# Altium PCB PCB.PcbDoc (part 3 of 3)
Units mm, origin at the board's own origin, x right, y up, seen from the top; angles counter-clockwise.
Board outline 116.97 x 81.03 mm, 4 copper layers (Top Layer, Int1 (GND), Int2 (PWR), Bottom Layer), stack 1.369 mm thick; 124 components, 94 nets, 431 pads, 1026 vias.
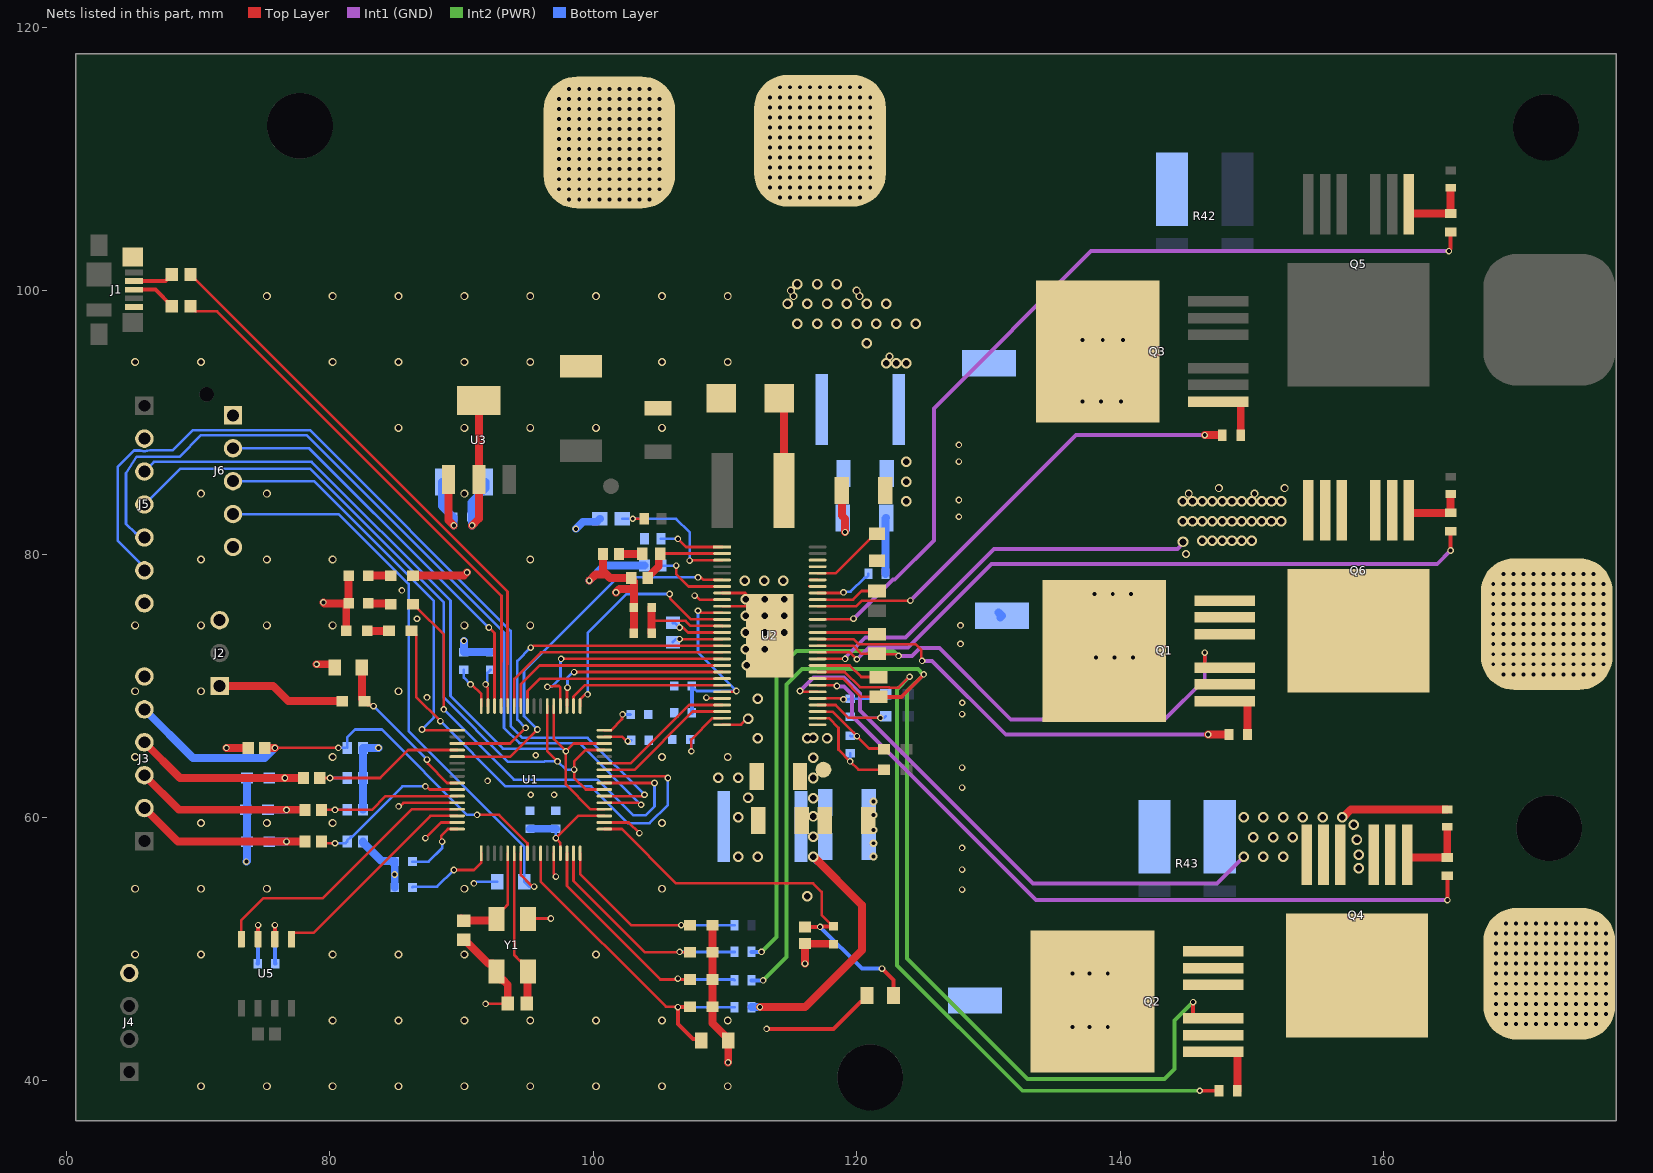
[diagram p4: the nets of this part, all layers, seen from the top]

## Via types
v1: diameter 0.5, hole 0.3, Top Layer to Bottom Layer, 784 vias
v2: diameter 0.8/0.8/0.8/0.8 (per signal layer), hole 0.5, Top Layer to Bottom Layer, 130 vias
v3: diameter 0.6, hole 0.4, Top Layer to Bottom Layer, 82 vias
v4: diameter 0.6, hole 0.3, Top Layer to Bottom Layer, 23 vias
v5: diameter 0.8, hole 0.5, Top Layer to Bottom Layer, 7 vias

## Nets (pads, with @x,y where several pads share a name; then routed paths per layer and width w, separated by ;. In a path a pad name is that pad's centre, name@x,y a point inside that pad or via, vN(x,y) a via of type N, cw(c..) or ccw(c..) an arc to the next point about the centre after c; other vN are vias at no path point) (continued)
H2_LOW: C1.2 C2.2 C3.1 C4.1 C5.2 C6.2 C7.2 C8.2 C9.2 C10.2 C11.2 C12.2 C13.2 C14.2 C15.2 C16.2 C17.2 C18.2 C19.2 C20.2 C21.2 C22.2 C23.2 C28.2 C29.1 C30.2 C31.2 C32.2 C33.2 C34.2 C35.1 C36.2 C37.2 C38.2 C40.2 C43.2 C44.2 C45.2 C46.2 C47.1 C48.1 C49.1 D1.1 D2.1 D3.1 D4.2 D5.2 J1.5 J1.6 J2.3 J3.6 J4.4 J5.7 J6.5 P1.P? Q6.2 Q6.3 Q6.5 Q6.6 Q6.7 R15.1 R17.2 R20.2 R23.2 R25.1 R29.1 R30.1 R31.1 R35.2 R42.1 R43.1 U1.12 U1.18 U1.60 U1.63 U2.8 U2.10 U2.28 U2.39 U2.57 U3.1 U5.2 Y1.2 Y1.4 | length 137.8
  Top Layer w0.2: v1(85.217,60.833) 85.298,60.833 85.578,61.113 89.656,61.113 U1.60@89.659,61.115 ; v1(87.249,58.42) 88.444,59.615 U1.63@89.659,59.615 ; v1(91.821,45.847) 93.493,45.847 C3.1@93.509,45.863 ; Y1.2@95.053,52.292 95.085,52.324 v1(96.774,52.324) ; U1.12@97,57.274 97,55.735 97.155,55.58 v1(97.155,55.499) ; U1.18@100.841,59.615 102.691,59.615 v1(103.505,58.801) ; U2.28@109.786,67.037 111.223,67.037 111.686,67.5 v2(111.75,67.5) ; U2.10@109.786,76.037 111.706,76.037 U2.57@113.411,74.332 ; U2.8@109.786,77.037 111.531,77.037 113.411,75.157 U2.57@113.411,74.332 ; U2.57@113.411,73.787 U2.57@113.411,74.332 ; U2.39@117.036,72.037 v1(119.126,72.037)
  Top Layer w0.3: U5.2@75.819,50.758 v1(75.819,51.816)
  Top Layer w0.6: v1(78.994,71.628) 80.204,71.628 80.382,71.45 C1.2@80.382,71.374 ; v1(79.502,76.327) 79.574,76.255 D1.1@81.419,76.255 ; D3.1@81.242,74.168 81.242,76.078 D1.1@81.419,76.255 ; D2.1@81.419,78.359 D1.1@81.419,76.255 ; U3.1@89.013,85.646 89.013,82.564 v1(89.408,82.169) ; C4.1@90.17,50.71 90.22,50.71 92.038,48.892 92.353,48.892 92.653,48.592 Y1.4@92.653,48.292 92.653,47.992 92.953,47.692 93.105,47.692 93.509,47.288 C3.1@93.509,45.863 ; v1(99.695,77.978) 100.16,78.443 101.008,78.443 ; C38.2@100.746,80.01 100.746,78.705 101.008,78.443 ; v1(101.727,77.089) 101.981,77.343 103.084,77.343 ; C33.2@103.084,73.992 C34.2@103.084,75.946 103.084,77.343 ; R31.1@109.054,51.816 R30.1@109.054,49.754 R29.1@109.054,47.693 R15.1@109.054,45.624 109.054,44.369 C23.2@110.245,43.178 ; v1(110.236,41.402) 110.245,41.411 C23.2@110.245,43.053 ; v1(116.078,48.895) R35.2@116.078,50.428 116.103,50.404 118.212,50.404 C45.2@118.237,50.379 ; 101.008,78.443 101.27,78.181 C40.2@102.88,78.181 102.88,78.131 103.084,77.927 103.084,77.343
  Int1 (GND) w0.3: v1(119.126,72.037) 119.126,72.091 119.226,72.191 119.226,72.236 120.65,73.66 123.698,73.66 130.429,80.391 144.354,80.391 144.78,80.817 v5(144.78,80.914)
  Bottom Layer w0.2: v1(90.932,54.991) 91.013,54.991 91.14,55.118 C2.2@92.701,55.118
  Bottom Layer w0.3: v1(75.819,51.816) 75.839,51.796 75.839,48.915 C46.2@75.859,48.895
  Bottom Layer w0.6: C14.2@82.515,58.166 82.515,58.091 83.914,56.692 84.898,56.692 84.923,56.667 C8.2@84.923,56.642 v1(84.923,55.665) C5.2@84.923,54.688 ; C15.2@82.515,60.579 C16.2@82.515,62.992 C13.2@82.515,65.278 v1(83.692,65.278) ; C43.2@88.52,85.471 88.52,83.652 89.318,82.854 89.343,82.854 89.368,82.829 C44.2@89.368,82.804 89.393,82.779 89.393,82.184 v1(89.408,82.169) ; v1(90.17,73.406) C7.2@90.17,72.557 C12.2@92.202,72.557 ; v1(98.679,81.915) 99.216,82.452 100.271,82.452 R25.1@100.496,82.677 ; v1(99.695,77.978) 100.838,79.121 R20.2@103.895,79.121 ; R17.2@122.189,78.486 122.189,82.712 C17.2@122.229,82.752 ; C48.1@130.778,75.565 C48.1@131.032,75.311 C48.1@130.905,75.184
  other v1: 128.013,54.51 128.013,56.034 128.013,57.685 95.25,61.722 97.028,61.722 128.013,62.257 91.975,62.78 128.013,63.781 95.631,64.72 128.013,67.845 128.016,68.707 87.373,69.115 127.886,73.179 127.886,74.576 86.611,75.084 85.468,77.243 127.759,82.831 127.759,84.101 127.759,87.022 127.759,88.292 98.171,106.934 98.933,106.934 99.695,106.934 100.457,106.934 101.219,106.934 101.981,106.934 102.743,106.934 103.505,106.934 104.267,106.934 97.409,107.696 98.171,107.696 98.933,107.696 99.695,107.696 100.457,107.696 101.219,107.696 101.981,107.696 102.743,107.696 103.505,107.696 104.267,107.696 105.029,107.696 97.409,108.458 98.171,108.458 98.933,108.458 99.695,108.458 100.457,108.458 101.219,108.458 101.981,108.458 102.743,108.458 103.505,108.458 104.267,108.458 105.029,108.458 97.409,109.22 98.171,109.22 98.933,109.22 99.695,109.22 100.457,109.22 101.219,109.22 101.981,109.22 102.743,109.22 103.505,109.22 104.267,109.22 105.029,109.22 97.409,109.982 98.171,109.982 98.933,109.982 99.695,109.982 100.457,109.982 101.219,109.982 101.981,109.982 102.743,109.982 103.505,109.982 104.267,109.982 105.029,109.982 97.409,110.744 98.171,110.744 98.933,110.744 99.695,110.744 100.457,110.744 101.219,110.744 101.981,110.744 102.743,110.744 103.505,110.744 104.267,110.744 105.029,110.744 97.409,111.506 98.171,111.506 98.933,111.506 99.695,111.506 100.457,111.506 101.219,111.506 101.981,111.506 102.743,111.506 103.505,111.506 104.267,111.506 105.029,111.506 97.409,112.268 98.171,112.268 98.933,112.268 99.695,112.268 100.457,112.268 101.219,112.268 101.981,112.268 102.743,112.268 103.505,112.268 104.267,112.268 105.029,112.268 97.409,113.03 98.171,113.03 98.933,113.03 99.695,113.03 100.457,113.03 101.219,113.03 101.981,113.03 102.743,113.03 103.505,113.03 104.267,113.03 105.029,113.03 97.409,113.792 98.171,113.792 98.933,113.792 99.695,113.792 100.457,113.792 101.219,113.792 101.981,113.792 102.743,113.792 103.505,113.792 104.267,113.792 105.029,113.792 97.409,114.554 98.171,114.554 98.933,114.554 99.695,114.554 100.457,114.554 101.219,114.554 101.981,114.554 102.743,114.554 103.505,114.554 104.267,114.554 105.029,114.554 98.171,115.316 98.933,115.316 99.695,115.316 100.457,115.316 101.219,115.316 101.981,115.316 102.743,115.316 103.505,115.316 104.267,115.316
  other v2: 116.25,54 111,57 112.5,57 111,60 111.75,61.5 109.5,63 111,63 112.5,66 112.5,69 111.639,71.552 111.569,72.771 113.03,72.771 111.569,74.041 113.03,74.041 114.49,74.041 111.569,75.311 113.03,75.311 114.49,75.311 111.569,76.581 113.03,76.581 114.49,76.581 111.506,77.978 112.966,77.978 114.427,77.978 146.25,81 146.25,81 147,81 147.75,81 147.75,81 148.5,81 149.25,81 150,81 144.75,82.5 145.5,82.5 145.5,82.5 146.25,82.5 147,82.5 147,82.5 147.75,82.5 148.5,82.5 148.5,82.5 149.25,82.5 150,82.5 150.75,82.5 151.5,82.5 151.5,82.5 152.25,82.5 123.75,84 144.75,84 144.75,84 145.5,84 146.25,84 146.25,84 147,84 147.75,84 147.75,84 148.5,84 149.25,84 149.25,84 150,84 150.75,84 150.75,84 151.5,84 152.25,84 123.75,85.5 123.75,87 123.75,87 122.25,94.5 123,94.5 123,94.5 123.75,94.5 120.75,96 120.75,96 115.5,97.5 115.5,97.5 117,97.5 117,97.5 118.5,97.5 118.5,97.5 120,97.5 121.5,97.5 123,97.5 124.5,97.5 114.75,99 116.25,99 116.25,99 117.75,99 119.25,99 120.75,99 122.25,99 115.5,100.5 115.5,100.5 117,100.5 117,100.5 118.5,100.5 118.5,100.5
  other v3: 70.212,39.583 75.212,39.583 80.212,39.583 85.212,39.583 90.212,39.583 95.212,39.583 100.212,39.583 105.212,39.583 110.212,39.583 80.212,44.583 85.212,44.583 90.212,44.583 95.212,44.583 100.212,44.583 105.212,44.583 110.212,44.583 65.212,49.583 70.212,49.583 80.212,49.583 85.212,49.583 90.212,49.583 100.212,49.583 65.212,54.583 70.212,54.583 75.212,54.583 90.212,54.583 105.212,54.583 70.212,59.583 75.212,59.583 80.212,59.583 105.212,59.583 65.212,64.583 80.212,64.583 105.212,64.583 110.212,64.583 65.212,69.583 70.212,69.583 85.212,69.583 65.212,74.583 70.212,74.583 75.212,74.583 80.212,74.583 90.212,74.583 95.212,74.583 70.212,79.583 75.212,79.583 80.212,79.583 95.212,79.583 145,80 70.212,84.583 75.212,84.583 90.212,84.583 145.212,84.583 150.212,84.583 147.5,85 152.5,85 85.212,89.583 90.212,89.583 95.212,89.583 100.212,89.583 105.212,89.583 65.212,94.583 70.212,94.583 80.212,94.583 85.212,94.583 90.212,94.583 95.212,94.583 105.212,94.583 110.212,94.583 122.5,95 75.212,99.583 80.212,99.583 85.212,99.583 90.212,99.583 95.212,99.583 100.212,99.583 105.212,99.583 110.212,99.583 115.212,99.583 120.212,99.583 115,100 120,100
  other v4: 121.285,57.023 121.285,58.039 121.285,59.055 121.285,60.198 121.285,61.214
H2_VS: C25.2 P4.P? Q1.2 Q1.3 Q1.5 Q1.6 Q1.7 Q6.8 R27.2 U2.41 | length 70.6
  Top Layer w0.2: U2.41@117.036,73.037 119.762,73.037 120.385,72.414 C25.2@121.539,72.414 121.563,72.39 122.982,72.39 123.109,72.263 v1(123.19,72.263)
  Top Layer w0.3: v1(146.431,72.517) 146.431,71.624 146.681,71.374 Q1.3@147.955,71.374
  Int1 (GND) w0.3: v1(123.19,72.263) 124.206,72.263 124.803,72.86 126.276,72.86 131.699,67.437 143.383,67.437 146.431,70.485 v1(146.431,72.517)
  Int2 (PWR) w0.3: v1(112.776,49.784) 113.919,50.927 113.919,71.12 115.443,72.644 122.809,72.644 v1(123.19,72.263)
  Bottom Layer w0.3: R27.2@112.029,49.784 v1(112.776,49.784)
  other v1: 169.1,70.866 169.862,70.866 170.624,70.866 171.386,70.866 172.148,70.866 172.91,70.866 173.672,70.866 174.434,70.866 175.196,70.866 175.958,70.866 168.338,71.628 169.1,71.628 169.862,71.628 170.624,71.628 171.386,71.628 172.148,71.628 172.91,71.628 173.672,71.628 174.434,71.628 175.196,71.628 175.958,71.628 176.72,71.628 168.338,72.39 169.1,72.39 169.862,72.39 170.624,72.39 171.386,72.39 172.148,72.39 172.91,72.39 173.672,72.39 174.434,72.39 175.196,72.39 175.958,72.39 176.72,72.39 168.338,73.152 169.1,73.152 169.862,73.152 170.624,73.152 171.386,73.152 172.148,73.152 172.91,73.152 173.672,73.152 174.434,73.152 175.196,73.152 175.958,73.152 176.72,73.152 168.338,73.914 169.1,73.914 169.862,73.914 170.624,73.914 171.386,73.914 172.148,73.914 172.91,73.914 173.672,73.914 174.434,73.914 175.196,73.914 175.958,73.914 176.72,73.914 168.338,74.676 169.1,74.676 169.862,74.676 170.624,74.676 171.386,74.676 172.148,74.676 172.91,74.676 173.672,74.676 174.434,74.676 175.196,74.676 175.958,74.676 176.72,74.676 168.338,75.438 169.1,75.438 169.862,75.438 170.624,75.438 171.386,75.438 172.148,75.438 172.91,75.438 173.672,75.438 174.434,75.438 175.196,75.438 175.958,75.438 176.72,75.438 168.338,76.2 169.1,76.2 169.862,76.2 170.624,76.2 171.386,76.2 172.148,76.2 172.91,76.2 173.672,76.2 174.434,76.2 175.196,76.2 175.958,76.2 176.72,76.2 168.338,76.962 169.1,76.962 169.862,76.962 170.624,76.962 171.386,76.962 172.148,76.962 172.91,76.962 173.672,76.962 174.434,76.962 175.196,76.962 175.958,76.962 176.72,76.962 168.338,77.724 169.1,77.724 169.862,77.724 170.624,77.724 171.386,77.724 172.148,77.724 172.91,77.724 173.672,77.724 174.434,77.724 175.196,77.724 175.958,77.724 176.72,77.724 169.1,78.486 169.862,78.486 170.624,78.486 171.386,78.486 172.148,78.486 172.91,78.486 173.672,78.486 174.434,78.486 175.196,78.486 175.958,78.486
H3_LOW: Q4.2 Q4.3 Q4.5 Q4.6 Q4.7 R41.2 R43.2 U2.34 | length 51.7
  Top Layer w0.2: v1(115.697,69.596) 115.754,69.539 117.034,69.539 U2.34@117.036,69.537
  Top Layer w0.6: v2(156.877,60) 156.931,60 157.525,60.594 R41.2@164.846,60.594
  Int1 (GND) w0.3: v1(115.697,69.596) 116.713,70.612 119.057,70.612 120.269,69.4 120.269,68.127 133.405,54.991 147.368,54.991 v2(149.377,57)
  other v2: 158.115,56.134 150.877,57 152.377,57 158.115,57.15 157.988,58.293 150.127,58.5 151.627,58.5 153.127,58.5 157.734,59.436 149.377,60 150.877,60 152.377,60 153.877,60 155.377,60
H3_VS: C27.2 P5.P? Q2.2 Q2.3 Q2.5 Q2.6 Q2.7 Q4.8 R28.2 U2.36 | length 99.3
  Top Layer w0.2: U2.36@117.036,70.537 118.947,70.537 120.324,69.16 C27.2@121.666,69.16
  Top Layer w0.3: C27.2@121.666,69.16 123.389,69.16 v1(125.095,70.866) ; v1(145.542,45.974) 145.542,44.995 145.792,44.745 Q2.3@147.066,44.745
  Int2 (PWR) w0.3: v1(112.903,47.625) 114.681,49.403 114.681,70.104 115.832,71.255 124.652,71.255 125.041,70.866 v1(125.095,70.866) 123.825,69.596 123.825,49.276 132.969,40.132 143.383,40.132 144.145,40.894 144.145,44.577 v1(145.542,45.974)
  Bottom Layer w0.3: R28.2@112.029,47.625 v1(112.903,47.625)
  other v1: 169.291,44.323 170.053,44.323 170.815,44.323 171.577,44.323 172.339,44.323 173.101,44.323 173.863,44.323 174.625,44.323 175.387,44.323 176.149,44.323 168.529,45.085 169.291,45.085 170.053,45.085 170.815,45.085 171.577,45.085 172.339,45.085 173.101,45.085 173.863,45.085 174.625,45.085 175.387,45.085 176.149,45.085 176.911,45.085 168.529,45.847 169.291,45.847 170.053,45.847 170.815,45.847 171.577,45.847 172.339,45.847 173.101,45.847 173.863,45.847 174.625,45.847 175.387,45.847 176.149,45.847 176.911,45.847 168.529,46.609 169.291,46.609 170.053,46.609 170.815,46.609 171.577,46.609 172.339,46.609 173.101,46.609 173.863,46.609 174.625,46.609 175.387,46.609 176.149,46.609 176.911,46.609 168.529,47.371 169.291,47.371 170.053,47.371 170.815,47.371 171.577,47.371 172.339,47.371 173.101,47.371 173.863,47.371 174.625,47.371 175.387,47.371 176.149,47.371 176.911,47.371 168.529,48.133 169.291,48.133 170.053,48.133 170.815,48.133 171.577,48.133 172.339,48.133 173.101,48.133 173.863,48.133 174.625,48.133 175.387,48.133 176.149,48.133 176.911,48.133 168.529,48.895 169.291,48.895 170.053,48.895 170.815,48.895 171.577,48.895 172.339,48.895 173.101,48.895 173.863,48.895 174.625,48.895 175.387,48.895 176.149,48.895 176.911,48.895 168.529,49.657 169.291,49.657 170.053,49.657 170.815,49.657 171.577,49.657 172.339,49.657 173.101,49.657 173.863,49.657 174.625,49.657 175.387,49.657 176.149,49.657 176.911,49.657 168.529,50.419 169.291,50.419 170.053,50.419 170.815,50.419 171.577,50.419 172.339,50.419 173.101,50.419 173.863,50.419 174.625,50.419 175.387,50.419 176.149,50.419 176.911,50.419 168.529,51.181 169.291,51.181 170.053,51.181 170.815,51.181 171.577,51.181 172.339,51.181 173.101,51.181 173.863,51.181 174.625,51.181 175.387,51.181 176.149,51.181 176.911,51.181 169.291,51.943 170.053,51.943 170.815,51.943 171.577,51.943 172.339,51.943 173.101,51.943 173.863,51.943 174.625,51.943 175.387,51.943 176.149,51.943
NetC1_1: C1.1 R1.1 U1.57 | length 12.4
  Top Layer w0.2: R1.1@82.432,68.99 82.888,68.534 83.15,68.534 83.231,68.453 v1(83.312,68.453) ; v1(87.376,64.389) 87.433,64.332 87.433,64.078 88.896,62.615 U1.57@89.659,62.615
  Top Layer w0.6: R1.1@82.432,68.99 C1.1@82.432,71.374
  Bottom Layer w0.2: v1(83.312,68.453) v1(87.376,64.389)
NetC2_1: C2.1 J6.4 U1.7 | length 45.7
  Top Layer w0.2: U1.7@94.5,57.274 94.5,55.614 95.252,54.862 95.297,54.862 95.423,54.737 v1(95.504,54.737)
  Bottom Layer w0.2: J6.4@72.644,83.031 80.672,83.031 85.979,77.724 85.979,66.548 94.751,57.776 C2.1@94.751,55.118 94.751,55.115 95.129,54.737 v1(95.504,54.737)
NetC3_2: C3.2 U1.6 Y1.1 | length 11.7
  Top Layer w0.2: U1.6@94,57.274 94,54.175 93.999,54.174 93.999,49.54 94.447,49.092 94.553,49.092 94.799,48.846 Y1.1@94.799,48.419
  Top Layer w0.6: C3.2@94.942,45.879 C3.2@94.959,45.863 95.006,45.91 95.006,48.245 Y1.1@95.053,48.292
NetC4_2: C4.2 U1.5 Y1.3 | length 8.2
  Top Layer w0.2: Y1.3@92.653,52.292 92.653,52.592 93.153,53.092 93.224,53.092 93.5,53.368 U1.5@93.5,57.274
  Top Layer w0.6: C4.2@89.945,52.335 90.12,52.16 C4.2@90.17,52.16 92.521,52.16 Y1.3@92.653,52.292
NetC11_1: C11.1 U1.31 | length 2.2
  Top Layer w0.2: U1.31@100.841,66.115 102.206,66.115 102.535,65.786 v1(102.616,65.786)
  Bottom Layer w0.2: v1(102.616,65.786) 102.792,65.786 C11.1@102.87,65.864
NetC12_1: C12.1 U1.47 | length 3
  Top Layer w0.2: v1(91.821,70.104) 91.821,70.023 92,69.844 U1.47@92,68.456
  Bottom Layer w0.2: v1(91.821,70.104) 91.821,70.185 91.952,70.316 91.952,70.982 92.177,71.207 C12.1@92.202,71.207
NetC13_1: C13.1 J3.5 R7.1 U1.8 | length 36.9
  Top Layer w0.2: v1(75.819,65.278) v1(80.645,65.278) ; v1(91.186,60.198) 92.837,60.198 95,58.035 U1.8@95,57.274
  Top Layer w0.6: R7.1@75.048,65.278 v1(75.819,65.278)
  Bottom Layer w0.2: v1(80.645,65.278) C13.1@81.153,65.278 ; C13.1@81.315,65.278 81.315,66.075 81.915,66.675 83.947,66.675 90.424,60.198 v1(91.186,60.198)
  Bottom Layer w0.6: J3.5@65.913,68.206 69.603,64.516 75.057,64.516 v1(75.819,65.278)
NetC14_1: C14.1 R13.2 U1.58 | length 12.3
  Top Layer w0.2: R13.2@79.366,58.166 79.493,58.039 v1(80.391,58.039) ; v1(87.249,62.357) 87.33,62.357 87.572,62.115 U1.58@89.659,62.115
  Bottom Layer w0.2: v1(80.391,58.039) 81.188,58.039 C14.1@81.315,58.166 81.315,58.241 81.59,58.516 81.665,58.516 85.506,62.357 v1(87.249,62.357)
NetC15_1: C15.1 R12.2 U1.59 | length 11.6
  Top Layer w0.2: R12.2@79.366,60.579 83.185,60.579 84.221,61.615 U1.59@89.659,61.615
  Bottom Layer w0.2: v1(80.391,60.579) C15.1@81.315,60.579
NetC16_1: C16.1 R11.2 U1.52 | length 12.4
  Top Layer w0.2: R11.2@79.239,62.992 v1(80.01,62.992) 83.82,62.992 85.943,65.115 U1.52@89.659,65.115
  Bottom Layer w0.2: v1(80.01,62.992) C16.1@81.061,62.992
NetC23_1: C23.1 R14.1 R15.2 U1.10 | length 25.2
  Top Layer w0.2: U1.10@96,57.159 96,55.13 105.506,45.624 v1@106.426,45.624
  Top Layer w0.3: R15.2@107.354,45.624 107.339,45.608 106.441,45.608 v1(106.426,45.593) 106.426,44.323 107.569,43.18 108.068,43.18 C23.1@108.195,43.053
  Bottom Layer w0.2: v1(106.426,45.593) R14.1@110.729,45.593
NetC24_1: C24.1 U2.48 | length 4.8
  Top Layer w0.2: U2.48@117.036,76.537 119.717,76.537 120.372,77.192 C24.1@121.539,77.192
NetC25_1: C25.1 U2.43 | length 4.6
  Top Layer w0.2: U2.43@117.036,74.037 121.416,74.037 C25.1@121.539,73.914
NetC26_1: C26.1 U2.52 | length 5.7
  Top Layer w0.2: U2.52@117.036,78.537 118.408,78.537 121.414,81.543 C26.1@121.539,81.543
NetC26_2: C26.2 D4.1 L1.1 U2.50 U2.51 | length 8.6
  Top Layer w0.2: U2.50@116.39,77.539 117.034,77.539 U2.50@117.036,77.537 ; U2.51@116.465,78.037 U2.51@117.036,78.037 ; C26.2@121.412,79.366 C26.2@121.539,79.493
  Top Layer w0.3: L1.1@114.491,84.836 L1.1@114.526,84.871
  Top Layer w0.6: D4.1@114.128,91.821 114.491,91.458 L1.1@114.491,84.836
NetC27_1: C27.1 U2.38 | length 5
  Top Layer w0.2: U2.38@117.036,71.537 119.471,71.537 120.348,70.66 C27.1@121.666,70.66
NetC30_1: C30.1 U2.27 | length 4.8
  Top Layer w0.2: v1(107.442,65.024) 107.442,65.913 109.064,67.535 109.783,67.535 U2.27@109.786,67.537
  Bottom Layer w0.2: C30.1@107.355,65.913 107.442,65.826 v1(107.442,65.024)
NetC33_1: C33.1 C34.1 U2.13 | length 7.5
  Top Layer w0.2: 104.434,74.93 107.006,74.93 107.393,74.543 109.2,74.543 109.203,74.539 109.783,74.539 U2.13@109.786,74.537
  Top Layer w0.6: C33.1@104.434,73.992 104.434,74.93 C34.1@104.434,75.946
NetC38_1: C38.1 R18.2 | length 1.8
  Top Layer w0.6: C38.1@101.946,80.01 R18.2@103.719,80.01
NetC39_1: C39.1 R19.2 U2.32 | length 8.4
  Top Layer w0.2: U2.32@117.036,68.537 118.407,68.537 119.38,67.564 v1(121.793,67.564)
  Bottom Layer w0.2: C39.1@119.507,67.651 119.594,67.564 R19.2@122.086,67.564 ; v1(121.793,67.564) R19.2@122.086,67.564 ; R19.2@122.086,67.564 R19.2@122.213,67.691 R19.2@122.086,67.564
NetC39_2: C39.2 R16.2 U2.33 | length 5.4
  Top Layer w0.2: U2.33@117.036,69.037 118.732,69.037 118.75,69.018 118.942,69.018 v1(118.999,68.961)
  Bottom Layer w0.2: v1(118.999,68.961) 119.467,68.961 C39.2@119.507,69.001 121.822,69.001 122.163,69.342 R16.2@122.213,69.342
NetC40_1: C40.1 R18.1 U2.2 | length 6.9
  Top Layer w0.2: R18.1@105.069,80.01 105.096,80.037 U2.2@109.786,80.037
  Top Layer w0.6: C40.1@104.13,78.181 104.13,78.231 104.969,79.07 104.969,79.91 R18.1@105.069,80.01
NetC41_1: C41.1 R22.2 U2.30 | length 8.2
  Top Layer w0.2: U2.30@117.036,67.537 117.039,67.535 117.885,67.535 118.618,66.802 118.618,65.151 v1(119.507,64.262) 120.142,63.627 R22.2@122.086,63.627
  Bottom Layer w0.2: v1(119.507,64.262) C41.1@119.507,64.857
NetC41_2: C41.2 R21.2 U2.31 | length 6.8
  Top Layer w0.2: U2.31@117.036,68.037 117.039,68.035 118.147,68.035 v1(120.015,66.167) ; v1@119.958,66.224 120.945,65.237 122.03,65.237 R21.2@122.086,65.181
  Bottom Layer w0.2: C41.2@119.507,66.207 119.547,66.167 v1(120.015,66.167)
NetC42_1: C42.1 U2.15 | length 3.8
  Top Layer w0.2: v1(106.553,73.537) 106.934,73.537 U2.15@109.786,73.537
  Bottom Layer w0.2: C42.1@106.045,73.316 106.266,73.537 v1(106.553,73.537)
NetC42_2: C42.2 U2.14 | length 3.8
  Top Layer w0.2: 106.807,74.422 106.815,74.422 107.2,74.037 U2.14@109.786,74.037
  Bottom Layer w0.2: C42.2@106.045,74.766 106.209,74.766 v1(106.553,74.422)
NetC45_1: C45.1 R35.1 U1.17 U4.1 | length 32
  Top Layer w0.2: U1.17@100.841,59.115 102.175,59.115 106.299,54.991 116.68,54.991 117.335,54.336 117.335,52.606 118.212,51.729 C45.1@118.237,51.729
  Top Layer w0.3: R35.1@116.078,51.68 116.083,51.684 117.216,51.684 v1(117.221,51.689) ; v1@117.221,51.704 C45.1@118.237,51.704 ; v1(121.92,48.514) 122.793,47.641 U4.1@122.793,46.482
  Bottom Layer w0.3: v1(117.221,51.689) 120.396,48.514 v1(121.92,48.514)
NetD1_2: D1.2 R6.1 | length 1.7
  Top Layer w0.6: D1.2@82.919,76.255 82.946,76.227 84.594,76.227 R6.1@84.621,76.2
NetD2_2: D2.2 R4.1 | length 1.7
  Top Layer w0.6: D2.2@82.919,78.359 R4.1@84.621,78.359
NetD3_2: D3.2 R5.1 | length 1.7
  Top Layer w0.6: D3.2@82.842,74.168 R5.1@84.494,74.168
NetJ1_2: J1.2 R2.1 | length 3.1
  Top Layer w0.3: J1.2@65.13,100.719 67.505,100.719 67.992,101.205 R2.1@67.992,101.219
NetJ1_3: J1.3 R3.1 | length 3.4
  Top Layer w0.3: J1.3@65.13,100.069 66.742,100.069 67.992,98.82 R3.1@67.992,98.806
NetJ2_1: J2.1 R1.2 | length 9.8
  Top Layer w0.6: J2.1@71.628,69.977 75.692,69.977 76.835,68.834 R1.2@80.938,68.834
NetJ3_2: J3.2 R10.1 R13.1 | length 14.6
  Top Layer w0.6: J3.2@65.913,60.706 68.453,58.166 v1(76.708,58.166) R13.1@78.114,58.166
  Bottom Layer w0.6: R10.1@75.399,58.166 v1(76.708,58.166)
NetJ3_3: J3.3 R9.1 R12.1 | length 14.7
  Top Layer w0.6: J3.3@65.913,63.206 68.54,60.579 v1(76.708,60.579) R12.1@78.114,60.579
  Bottom Layer w0.6: R9.1@75.311,60.579 v1(76.708,60.579)
NetJ3_4: J3.4 R8.1 R11.1 | length 14.4
  Top Layer w0.6: J3.4@65.913,65.706 68.627,62.992 v1(76.581,62.992) R11.1@77.987,62.992
  Bottom Layer w0.6: R8.1@75.399,62.992 v1(76.581,62.992)
NetJ5_5: J5.5 U1.21 | length 64.9
  Top Layer w0.2: U1.21@100.841,61.115 103.396,61.115 103.551,60.96 v1(103.632,60.96)
  Bottom Layer w0.2: J5.5@65.913,81.261 65.588,81.261 65.262,81.587 65.225,81.587 64.516,82.296 64.516,86.077 64.516,86.136 65.322,87.376 68.58,87.376 70.231,89.027 78.232,89.027 93.218,74.041 93.218,66.802 94.385,65.635 98.957,65.635 v1(103.632,60.96)
NetJ5_6: J5.6 U1.22 | length 68.7
  Top Layer w0.2: U1.22@100.841,61.615 103.698,61.615 103.805,61.722 v1(103.886,61.722)
  Bottom Layer w0.2: J5.6@65.913,78.761 65.913,78.994 63.881,81.026 63.881,86.614 65.128,87.861 65.578,87.861 65.716,87.831 ccw(c65.913,88.761) 66.11,87.831 66.359,87.884 68.072,87.884 69.596,89.408 78.486,89.408 93.726,74.168 93.726,66.929 94.615,66.04 99.568,66.04 v1(103.886,61.722)
NetJ6_2: J6.2 U1.46 | length 31.2
  Top Layer w0.2: v1(92.075,74.422) 92.5,73.997 U1.46@92.5,68.456
  Bottom Layer w0.2: J6.2@72.644,88.031 78.421,88.031 88.404,78.048 92.03,74.422 v1(92.075,74.422)
NetJ6_3: J6.3 U1.49 | length 31.8
  Top Layer w0.2: v1(86.995,66.675) 87.052,66.618 87.26,66.618 87.262,66.615 88.181,66.615 U1.49@89.659,66.615
  Bottom Layer w0.2: J6.3@72.644,85.531 78.807,85.531 87.884,76.454 87.884,67.564 v1(86.995,66.675)
NetQ1_1: Q1.1 R33.2 | length 4.2
  Top Layer w0.6: Q1.1@147.955,68.834 149.572,68.834 149.672,68.734 R33.2@149.672,66.294
NetQ2_1: Q2.1 R34.2 | length 4.7
  Top Layer w0.6: Q2.1@147.066,42.205 148.81,42.205 148.91,42.105 R34.2@148.91,39.243
NetQ3_1: Q3.1 R32.2 | length 4.2
  Top Layer w0.6: Q3.1@147.453,91.567 149.064,91.567 149.164,91.467 R32.2@149.164,89.027
NetQ4_1: Q4.1 R38.2 R41.1 | length 5.5
  Top Layer w0.6: Q4.1@161.798,57.156 161.798,57.062 161.898,56.962 R38.2@164.846,56.962 R41.1@164.846,59.294
NetQ5_1: Q5.1 R36.2 R39.1 | length 5.8
  Top Layer w0.6: Q5.1@161.925,106.559 161.925,105.957 162.025,105.857 R36.2@165.1,105.857 R39.1@165.1,107.808
NetQ6_1: Q6.1 R37.2 R40.2 | length 4.8
  Top Layer w0.6: Q6.1@161.925,83.318 161.925,83.224 162.025,83.124 R37.2@165.1,83.124 R40.2@165.1,84.567
NetR5_2: R5.2 U1.25 | length 35.8
  Top Layer w0.2: R5.2@86.194,74.168 86.244,74.168 86.544,73.868 86.544,69.158 v1(88.392,67.31) ; U1.25@100.841,63.115 105.46,63.115 105.583,62.992 v1(105.664,62.992)
  Bottom Layer w0.2: v1(88.392,67.31) 93.345,62.357 99.822,62.357 102.616,59.563 104.267,59.563 105.664,60.96 v1(105.664,62.992)
NetR6_2: R6.2 U1.24 | length 34.2
  Top Layer w0.2: R6.2@86.321,76.2 86.371,76.2 86.671,75.9 86.671,75.85 88.646,73.875 v1(88.646,68.199) ; U1.24@100.841,62.615 104.644,62.615 v1(104.648,62.611)
  Bottom Layer w0.2: v1(88.646,68.199) 93.98,62.865 100.33,62.865 103.041,60.154 103.969,60.154 104.648,60.833 v1(104.648,62.611)
NetR17_1: R17.1 U2.49 | length 4.5
  Top Layer w0.2: U2.49@117.036,77.037 117.039,77.039 118.949,77.039 v1(118.999,77.089)
  Bottom Layer w0.2: v1(118.999,77.089) 119.056,77.146 119.549,77.146 120.589,78.186 120.689,78.186 120.889,78.386 R17.1@120.889,78.486
NetR20_1: R20.1 U2.7 | length 5.7
  Top Layer w0.2: v1(106.299,79.121) 106.299,78.486 107.248,77.537 U2.7@109.786,77.537
  Bottom Layer w0.2: R20.1@105.147,79.121 v1(106.299,79.121)
NetR23_1: R23.1 U2.1 | length 4.9
  Top Layer w0.2: v1(106.426,81.153) 107.042,80.537 U2.1@109.786,80.537
  Bottom Layer w0.2: R23.1@105.146,81.153 v1(106.426,81.153)
NetR24_1: R24.1 R25.2 U2.3 | length 11.1
  Top Layer w0.2: v1(102.997,82.677) R24.1@103.871,82.677 ; v1(107.315,79.502) 107.35,79.537 U2.3@109.786,79.537
  Bottom Layer w0.2: R25.2@102.196,82.677 v1(102.997,82.677) 106.299,82.677 107.315,81.661 v1(107.315,79.502)
NetR26_1: R26.1 R31.2 U1.16 | length 15.6
  Top Layer w0.2: U1.16@99,57.274 99,55.686 102.87,51.816 v1(106.68,51.816) R31.2@107.354,51.816
  Bottom Layer w0.2: v1(106.68,51.816) R26.1@110.729,51.816
NetR27_1: R27.1 R30.2 U1.15 | length 17.4
  Top Layer w0.2: U1.15@98.5,57.274 98.5,55.17 103.916,49.754 v1@106.553,49.754 ; v1(106.553,49.784) v1@106.553,49.754 ; R30.2@107.354,49.754 v1@106.553,49.754
  Bottom Layer w0.2: v1(106.553,49.784) R27.1@110.729,49.784
NetR28_1: R28.1 R29.2 U1.14 | length 19.2
  Top Layer w0.2: U1.14@98,57.274 98,54.79 105.097,47.693 v1@106.426,47.693 ; v1(106.426,47.752) v1@106.426,47.693 ; R29.2@107.354,47.693 v1@106.426,47.693
  Bottom Layer w0.2: v1(106.426,47.752) 106.482,47.696 110.658,47.696 R28.1@110.729,47.625
NetR32_1: R32.1 U2.47 | length 36.1
  Top Layer w0.2: U2.47@117.036,76.037 119.979,76.037 120.396,76.454 v1(124.079,76.454)
  Top Layer w0.6: v1(146.431,89.027) R32.1@147.762,89.027
  Int1 (GND) w0.3: v1(124.079,76.454) 136.652,89.027 v1(146.431,89.027)
NetR33_1: R33.1 U2.42 | length 34.7
  Top Layer w0.2: U2.42@117.036,73.537 119.757,73.537 120.142,73.152 124.46,73.152 124.915,72.697 124.915,71.935 v1(124.968,71.882)
  Top Layer w0.6: v1(146.685,66.294) R33.1@148.27,66.294
  Int1 (GND) w0.3: v1(124.968,71.882) 125.73,71.882 131.318,66.294 v1(146.685,66.294)
NetR34_1: R34.1 U2.37 | length 58.5
  Top Layer w0.2: U2.37@117.036,71.037 119.082,71.037 120.234,69.885 122.445,69.885 122.479,69.85 123.19,69.85 v1(124.022,70.682)
  Top Layer w0.3: v1(146.05,39.243) R34.1@147.508,39.243
  Int2 (PWR) w0.3: v1(124.022,70.682) 123.063,69.723 123.063,48.768 132.588,39.243 v1(146.05,39.243)
NetR36_1: R36.1 U2.45 | length 66.9
  Top Layer w0.2: U2.45@117.036,75.037 117.039,75.039 119.62,75.039 119.68,75.099 v1(119.761,75.099)
  Top Layer w0.3: v1(164.973,102.997) 164.973,103.051 165.1,103.178 R36.1@165.1,104.455
  Int1 (GND) w0.3: v1(119.761,75.099) 119.803,75.099 122.765,78.061 122.892,78.061 125.857,81.026 125.857,91.059 137.795,102.997 v1(164.973,102.997)
NetR37_1: R37.1 U2.40 | length 53.2
  Top Layer w0.2: U2.40@117.036,72.537 119.487,72.537 v1(120.015,72.009)
  Top Layer w0.3: v1(165.1,80.264) R37.1@165.1,81.722
  Int1 (GND) w0.3: v1(120.015,72.009) 120.023,72.009 120.927,72.913 123.909,72.913 130.244,79.248 164.084,79.248 v1(165.1,80.264)
NetR38_1: R38.1 U2.35 | length 57.4
  Top Layer w0.2: U2.35@117.036,70.037 118.35,70.037 118.41,69.977 v1(118.491,69.977)
  Top Layer w0.3: v1(164.846,53.721) R38.1@164.846,55.56
  Int1 (GND) w0.3: v1(118.491,69.977) 118.529,69.939 119.037,69.939 119.634,69.342 119.634,67.691 133.604,53.721 v1@164.824,53.721
NetU1_26: U1.26 U2.26 | length 10.8
  Top Layer w0.2: U1.26@100.841,63.615 103.112,63.615 107.534,68.037 U2.26@109.786,68.037
NetU1_27: U1.27 U2.25 | length 10.8
  Top Layer w0.2: U1.27@100.841,64.115 102.85,64.115 107.272,68.537 U2.25@109.786,68.537
NetU1_33: U1.33 U2.12 | length 18.3
  Top Layer w0.2: U1.33@99,68.456 99,68.944 99.388,69.332 99.558,69.332 v1(99.568,69.342) ; v1(105.791,76.962) 105.833,76.92 105.833,76.626 107.422,75.037 U2.12@109.786,75.037
  Bottom Layer w0.2: v1(99.568,69.342) 99.568,73.998 102.532,76.962 v1(105.791,76.962)
NetU1_34: U1.34 U2.22 | length 12.4
  Top Layer w0.2: U1.34@98.5,68.456 98.5,69.163 99.374,70.037 U2.22@109.786,70.037
NetU1_35: U1.35 U2.20 | length 14.1
  Top Layer w0.2: U1.35@98,68.456 98.002,68.459 98.002,69.808 v1(98.044,69.85) ; v1(98.552,71.037) U2.20@109.786,71.037
  Bottom Layer w0.2: v1(98.044,69.85) 98.044,70.607 98.474,71.037 v1(98.552,71.037)
NetU1_36: U1.36 U2.18 | length 17.4
  Top Layer w0.2: v1(96.52,69.908) 96.577,69.965 97.059,69.965 97.07,69.977 97.383,69.977 97.5,69.86 U1.36@97.5,68.456 ; v1(97.552,72.037) 97.555,72.039 109.783,72.039 U2.18@109.786,72.037
  Bottom Layer w0.2: v1(96.52,69.908) 96.553,69.941 96.865,69.941 97.514,70.59 97.514,71.999 v1(97.552,72.037)
NetU1_41: U1.41 U2.21 | length 16.3
  Top Layer w0.2: U1.41@95,68.456 95,69.6 95.937,70.537 U2.21@109.786,70.537
NetU1_42: U1.42 U2.19 | length 17.5
  Top Layer w0.2: U1.42@94.5,68.456 94.5,70.116 95.921,71.537 U2.19@109.786,71.537
NetU1_43: U1.43 U2.17 | length 18.7
  Top Layer w0.2: U1.43@94,68.456 94.002,68.459 94.002,70.507 96.032,72.537 U2.17@109.786,72.537
NetU1_51: U1.51 U2.16 | length 27.1
  Top Layer w0.2: U1.51@89.659,65.615 93.682,65.615 v1(94.869,66.802) ; v1(95.25,72.898) 95.331,72.898 95.47,73.037 U2.16@109.786,73.037
  Bottom Layer w0.2: v1(94.869,66.802) 94.234,67.437 94.234,71.882 v1(95.25,72.898)
NetU1_53: U1.53 U2.6 | length 29.9
  Top Layer w0.2: U1.53@89.659,64.615 93.697,64.615 v1(95.758,66.676) ; v1(107.95,78.232) 108.007,78.175 108.216,78.175 108.351,78.039 U2.6@109.783,78.039
  Bottom Layer w0.2: v1(95.758,66.676) 94.742,67.692 94.742,71.12 101.854,78.232 v1(107.95,78.232)
NetU1_61: U1.61 U5.4 | length 21.3
  Top Layer w0.2: U5.4@73.279,50.758 73.279,52.197 74.93,53.848 79.442,53.848 86.209,60.615 U1.61@89.659,60.615
NetU1_62: U1.62 U5.1 | length 16.6
  Top Layer w0.2: U5.1@77.089,50.758 77.089,51.059 77.264,51.234 78.749,51.234 87.631,60.115 U1.62@89.659,60.115
OC_Adjust: C31.1 C32.1 U2.11 U2.23 | length 15.9
  Top Layer w0.2: v1(107.95,75.692) 108.031,75.692 108.186,75.537 U2.11@109.786,75.537 ; U2.23@109.786,69.537 109.788,69.539 110.814,69.539 v1(110.871,69.596)
  Bottom Layer w0.2: C32.1@107.482,69.952 107.707,69.727 107.732,69.727 107.863,69.596 v1(110.871,69.596) 107.95,72.517 v1(107.95,75.692)
  Bottom Layer w0.3: C31.1@107.482,67.945 107.482,69.952 C32.1@107.482,69.977
RX_SCL_MOSI: J5.4 U1.23 U1.29 U1.38 | length 58.6
  Top Layer w0.2: U1.38@96.5,68.456 96.5,65.044 v1(97.282,64.262) ; U1.23@100.841,62.115 99.429,62.115 98.552,62.992 v1(98.552,63.627) 98.552,64.262 99.405,65.115 U1.29@100.841,65.115
  Bottom Layer w0.2: J5.4@65.913,83.761 68.639,86.487 78.486,86.487 88.646,76.327 88.646,69.088 93.514,64.22 96.263,64.22 96.305,64.262 v1(97.282,64.262) 97.917,63.627 v1(98.552,63.627)
TX_SDA_NSS: J5.3 U1.20 U1.30 U1.37 | length 58.9
  Top Layer w0.2: U1.37@97,68.456 97,65.941 v1(97.917,65.024) ; U1.20@100.841,60.615 99.786,60.615 97.917,62.484 v1(97.917,65.024) ; U1.30@100.841,65.615 98.508,65.615 v1(97.917,65.024)
  Bottom Layer w0.2: J5.3@65.913,86.261 66.647,86.995 78.613,86.995 89.154,76.454 89.154,69.215 93.149,65.22 97.65,65.22 97.846,65.024 v1(97.917,65.024)
USB_N: R2.2 U1.44 | length 42.8
  Top Layer w0.2: R2.2@69.422,101.219 69.422,101.205 69.79,100.838 69.803,100.838 93.487,77.154 93.487,71.64 93.477,71.63 93.477,68.97 93.5,68.947 U1.44@93.5,68.456
USB_P: R3.2 U1.45 | length 41.1
  Top Layer w0.2: R3.2@69.422,98.806 69.422,98.792 69.79,98.425 71.433,98.425 93.033,76.825 93.033,71.828 93.023,71.818 93.023,68.97 93,68.947 U1.45@93,68.456
V_SUPPLY: C17.1 C18.1 C19.1 C20.1 C21.1 C22.1 C28.1 C29.2 C35.2 C37.1 C47.2 C48.2 C49.2 P2.P? Q1.8 Q2.8 Q3.8 R14.2 TP1.TP? U2.29 U2.53 U2.54 | length 30.8
  Top Layer w0.6: v1(112.649,45.593) 116.078,45.593 120.396,49.911 120.396,53.34 v5(116.713,57.023) ; C37.1@118.873,84.836 118.873,82.93 119.126,82.677 v1(119.126,81.661)
  Bottom Layer w0.6: R14.2@112.029,45.593 v1(112.649,45.593) ; v5(116.713,57.023) 116.713,56.969 v5@116.967,56.715 ; P2.P?@117.094,108.712 P2.P?@121.031,108.712 ; v1(121.031,108.585) v1(121.031,109.347) v1(121.031,110.109) P2.P?@121.031,110.744 ; v1(121.031,110.871) 121.031,111.672 P2.P?@121.754,112.395 ; C47.2@138.748,94.488 C47.2@139.002,94.234
  other v1: 114.173,107.061 114.935,107.061 115.697,107.061 116.459,107.061 117.221,107.061 117.983,107.061 118.745,107.061 119.507,107.061 120.269,107.061 113.411,107.823 114.173,107.823 114.935,107.823 115.697,107.823 116.459,107.823 117.221,107.823 117.983,107.823 118.745,107.823 119.507,107.823 120.269,107.823 121.031,107.823 113.411,108.585 114.173,108.585 114.935,108.585 115.697,108.585 116.459,108.585 117.221,108.585 117.983,108.585 118.745,108.585 119.507,108.585 120.269,108.585 113.411,109.347 114.173,109.347 114.935,109.347 115.697,109.347 116.459,109.347 117.221,109.347 117.983,109.347 118.745,109.347 119.507,109.347 120.269,109.347 113.411,110.109 114.173,110.109 114.935,110.109 115.697,110.109 116.459,110.109 117.221,110.109 117.983,110.109 118.745,110.109 119.507,110.109 120.269,110.109 113.411,110.871 114.173,110.871 114.935,110.871 115.697,110.871 116.459,110.871 117.221,110.871 117.983,110.871 118.745,110.871 119.507,110.871 120.269,110.871 113.411,111.633 114.173,111.633 114.935,111.633 115.697,111.633 116.459,111.633 117.221,111.633 117.983,111.633 118.745,111.633 119.507,111.633 120.269,111.633 121.031,111.633 113.411,112.395 114.173,112.395 114.935,112.395 115.697,112.395 116.459,112.395 117.221,112.395 117.983,112.395 118.745,112.395 119.507,112.395 120.269,112.395 121.031,112.395 113.411,113.157 114.173,113.157 114.935,113.157 115.697,113.157 116.459,113.157 117.221,113.157 117.983,113.157 118.745,113.157 119.507,113.157 120.269,113.157 121.031,113.157 113.411,113.919 114.173,113.919 114.935,113.919 115.697,113.919 116.459,113.919 117.221,113.919 117.983,113.919 118.745,113.919 119.507,113.919 120.269,113.919 121.031,113.919 113.411,114.681 114.173,114.681 114.935,114.681 115.697,114.681 116.459,114.681 117.221,114.681 117.983,114.681 118.745,114.681 119.507,114.681 120.269,114.681 121.031,114.681 114.173,115.443 114.935,115.443 115.697,115.443 116.459,115.443 117.221,115.443 117.983,115.443 118.745,115.443 119.507,115.443 120.269,115.443
  other v2: 116.25,66 117.75,66 116.713,66.04
  other v4: 136.398,44.069 137.668,44.069 139.065,44.069 136.398,48.133 137.668,48.133 139.065,48.133 138.176,72.136 139.573,72.136 140.97,72.136 138.049,76.962 139.446,76.962 140.843,76.962 137.16,91.567 138.557,91.567 140.081,91.567 137.16,96.266 138.684,96.266 140.208,96.266
  other v5: 116.713,58.547 116.713,60.071 116.713,61.468 116.713,62.992 116.713,64.516
VCC: C5.1 C6.1 C7.1 C8.1 C9.1 C10.1 C43.1 C44.1 C46.1 J5.2 J6.1 R4.2 R7.2 R8.2 R9.2 R10.2 U1.1 U1.13 U1.19 U1.32 U1.48 U1.64 U2.9 U2.24 U3.2 U3.4 U4.2 U5.3 | length 68
  Top Layer w0.2: v1@88.392,58.166 88.449,58.223 88.449,58.604 88.96,59.115 U1.64@89.659,59.115 ; v1@89.421,56.007 90.932,56.007 91.494,56.569 91.494,57.268 U1.1@91.5,57.274 ; v1(90.678,70.104) 90.759,70.104 91.5,69.363 U1.48@91.5,68.456 ; U1.13@97.5,57.274 97.5,58.075 v1(97.155,58.42) 98.85,60.115 U1.19@100.841,60.115 ; U1.32@100.841,66.615 101.329,66.615 102.178,67.463 102.178,67.761 v1(102.235,67.818) ; v1(107.696,76.835) 107.777,76.835 108.075,76.537 U2.9@109.786,76.537 ; v1(108.585,69.088) 108.634,69.039 109.783,69.039 U2.24@109.786,69.037
  Top Layer w0.3: U5.3@74.549,50.758 v1(74.549,51.816) ; v1(113.157,43.942) 118.253,43.942 120.293,45.982 120.443,45.982 120.793,46.332 U4.2@120.793,46.482
  Top Layer w0.6: v1(72.136,65.278) R7.2@73.796,65.278 ; R4.2@86.321,78.359 90.17,78.359 v1(90.424,78.613) ; v1(90.805,82.169) 91.313,82.677 U3.2@91.313,85.646 U3.4@91.313,91.646
  Bottom Layer w0.2: C5.1@86.273,54.688 86.322,54.737 88.138,54.737 v1(89.408,56.007) ; C8.1@86.273,56.642 87.503,56.642 88.519,57.658 v1(88.519,58.166) ; C7.1@90.17,71.207 90.17,70.612 v1(90.678,70.104) ; v1(97.155,58.42) C9.1@97.155,59.142 ; v1(102.235,67.818) C6.1@102.83,67.818
  Bottom Layer w0.3: C46.1@74.509,48.895 74.529,48.915 74.529,51.796 v1(74.549,51.816)
  Bottom Layer w0.6: v1(73.66,56.642) 73.699,56.681 R10.2@73.699,58.166 R8.2@73.699,62.992 ; v1(90.805,82.169) 90.805,83.123 90.743,83.185 90.743,83.919 91.82,84.996 C43.1@91.82,85.471 ; C10.1@95.201,59.142 C9.1@97.155,59.142
pads on no net: J1.1 J1.4 J1.7 J1.8 J1.9 J1.10 J1.11 J6. U1.2 U1.3 U1.4 U1.9 U1.11 U1.28 U1.39 U1.40 U1.50 U1.54 U1.55 U1.56 U2.4 U2.5 U2.55 U2.56 U5.5 U5.8

## Polygon pours and split planes (outlines as drawn)
H2_LOW on Top Layer "H2_LOW_L01_P047" (solid, remove dead copper, pour order 47): 60.728,104.462 84.604,104.462 107.591,104.462 115.338,96.715 115.338,71.061 115.338,67.759 113.052,65.473 113.052,54.616 111.274,52.838 111.274,37.279 60.728,37.279
H2_LOW on Top Layer "H2_LOW_L01_P042" (solid, pour order 42): 112.776,88.646 110.998,90.424 88.011,90.424 87.884,90.297 87.884,96.266 110.871,96.266 112.776,94.361
H3_VS on Top Layer "H3_VS_L01_P011" (solid, pour order 11): 152.654,52.705 150.241,50.292 144.78,50.292 144.78,43.18 176.149,43.18 177.419,44.45 177.292,44.577 177.292,52.832
H1_LOW on Top Layer "H1_LOW_L01_P018" (solid, pour order 18): 161.036,104.267 150.622,104.267 149.987,104.902 147.701,104.902 147.701,110.49 161.036,110.49
H3_LOW on Top Layer "H3_LOW_L01_P012" (solid, pour order 12): 159.131,59.563 157.353,61.341 146.558,61.341 146.558,55.753 146.685,55.88 152.781,55.88 153.797,54.864 160.909,54.864 160.909,59.563
H1_VS on Top Layer "H1_VS_L01_P020" (solid, pour order 20): 145.161,92.456 177.546,92.456 177.546,102.997 169.164,102.997 167.894,102.108 167.513,102.108 152.4,102.108 149.86,99.695 149.733,99.695 145.288,99.695
NetC26_2 on Top Layer "NETC26_2_L01_P000" (solid, pour order 0): 114.046,82.042 114.046,79.883 116.392,77.537 120.082,77.537 121.475,78.93 121.475,79.756 121.031,79.756 119.38,78.105 116.397,78.105 114.554,79.948 114.554,82.042
H2_LOW on Top Layer "H2_LOW_L01_P029" (solid, pour order 29): 122.174,62.23 122.174,56.134 120.65,56.134 120.015,56.769 120.015,62.23
V_SUPPLY on Top Layer "V_SUPPLY_L01_P022" (solid, pour order 22): 116.205,67.056 115.062,65.913 115.062,56.388 118.237,56.388 118.237,64.262 118.237,66.548 117.729,67.056
V_SUPPLY on Top Layer "V_SUPPLY_L01_P034" (solid, pour order 34): 116.713,93.726 120.015,93.726 120.015,80.899 118.11,78.994 116.586,78.994 116.586,79.629 117.856,79.629 118.237,80.01 118.237,86.487 116.713,88.011 116.713,93.599
H2_LOW on Top Layer "H2_LOW_L01_P037" (solid, pour order 37): 121.539,95.885 123.571,95.885 124.714,94.742 124.714,84.074 123.698,83.312 123.444,83.312 121.539,83.312
V_SUPPLY on Top Layer "V_SUPPLY_L01_P024" (solid, pour order 24): 118.11,58.166 122.809,53.467 133.223,53.467 133.223,51.054 122.301,51.054 118.237,55.118 118.11,55.245 116.84,56.515
H2_LOW on Top Layer "H2_LOW_L01_P032" (solid, pour order 32): 115.189,76.962 111.125,76.962 111.125,66.167 108.839,63.246 108.839,55.88 112.903,55.88 112.903,68.326 115.189,70.612
H2_LOW on Top Layer "H2_LOW_L01_P016" (solid, pour order 16): 144.018,85.598 161.036,85.598 161.036,81.026 150.622,81.026 148.971,79.375 144.018,79.375
+5 on Top Layer "+5_L01_P033" (solid, pour order 33): 93.091,84.328 93.599,83.82 104.013,83.82 104.775,83.058 104.775,82.296 108.585,82.296 108.839,82.042 110.617,82.042 110.617,87.757 109.982,88.392 93.345,88.392 93.091,88.138
H2_VS on Top Layer "H2_VS_L01_P015" (solid, pour order 15): 145.669,76.962 150.368,76.962 152.273,78.867 168.148,78.867 169.037,79.756 177.419,79.756 177.419,69.596 176.784,69.596 152.654,69.596 145.669,69.596
V_SUPPLY on Top Layer "V_SUPPLY_L01_P005" (solid, pour order 5): 117.602,116.459 121.539,116.459 137.16,100.838 143.002,100.838 143.002,40.767 142.875,40.894 133.096,40.894 133.096,95.123 121.539,106.68 113.157,106.68 112.649,107.188 112.649,116.332
H2_LOW on Bottom Layer "H2_LOW_L04_P046" (solid, remove dead copper, pour order 46): 60.706,104.14 84.582,104.14 87.884,100.838 108.585,100.838 108.585,91.44 111.252,88.773 111.252,36.957 60.706,36.957
V_SUPPLY on Bottom Layer "V_SUPPLY_L04_P025" (solid, pour order 25): 141.859,77.724 137.287,77.724 137.287,71.374 137.414,71.501 141.859,71.501
V_SUPPLY on Bottom Layer "V_SUPPLY_L04_P027" (solid, pour order 27): 139.954,49.276 135.382,49.276 135.382,42.926 135.509,43.053 139.954,43.053
H1_LOW on Bottom Layer "H1_LOW_L04_P019" (solid, pour order 19): 161.036,104.267 150.622,104.267 149.987,104.902 147.701,104.902 147.701,110.49 161.036,110.49
H3_LOW on Bottom Layer "H3_LOW_L04_P013" (solid, pour order 13): 159.131,59.563 157.353,61.341 146.558,61.341 146.558,55.753 146.685,55.88 152.781,55.88 153.797,54.864 160.909,54.864 160.909,59.563
H2_LOW on Bottom Layer "H2_LOW_L04_P028" (solid, pour order 28): 122.174,62.23 122.174,56.134 120.65,56.134 120.015,56.769 120.015,62.23
H2_LOW on Bottom Layer "H2_LOW_L04_P030" (solid, pour order 30): 106.426,70.358 103.759,70.358 103.759,65.405 106.426,65.405
V_SUPPLY on Bottom Layer "V_SUPPLY_L04_P026" (solid, pour order 26): 140.97,97.028 136.398,97.028 136.398,90.678 136.525,90.805 140.97,90.805
V_SUPPLY on Bottom Layer "V_SUPPLY_L04_P023" (solid, pour order 23): 116.205,67.056 115.062,65.913 115.062,56.388 118.237,56.388 118.237,64.262 118.237,66.548 117.729,67.056
H2_LOW on Bottom Layer "H2_LOW_L04_P036" (solid, pour order 36): 120.015,56.769 119.38,56.134 119.38,55.118 113.665,55.118 112.903,55.88 108.839,55.88 108.839,54.229 110.49,52.578 121.412,52.578 122.174,53.594 122.174,53.848 122.174,56.769
H2_LOW on Bottom Layer "H2_LOW_L04_P038" (solid, pour order 38): 119.634,96.901 123.698,96.901 124.968,95.631 124.968,83.947 122.809,81.788 121.666,81.788 121.666,93.853 121.539,93.98 121.031,93.98 119.634,95.377
V_SUPPLY on Bottom Layer "V_SUPPLY_L04_P035" (solid, pour order 35): 116.586,93.853 116.586,78.486 116.586,67.437 116.078,66.929 116.078,65.786 118.11,65.786 118.11,69.469 117.856,69.85 117.856,70.993 117.856,77.978 120.015,80.137 120.015,93.853
H2_LOW on Bottom Layer "H2_LOW_L04_P010" (solid, pour order 10): 143.891,61.341 143.764,61.214 143.764,55.753 127.381,55.753 127.381,61.341
H2_LOW on Bottom Layer "H2_LOW_L04_P017" (solid, pour order 17): 153.162,81.026 150.622,81.026 148.971,79.375 132.461,79.375 131.953,79.883 131.953,85.598 153.162,85.598
H2_LOW on Bottom Layer "H2_LOW_L04_P007" (solid, pour order 7): 145.034,110.363 135.636,110.363 126.619,101.346 132.842,95.123 142.875,105.156 145.034,105.156
H2_LOW on Bottom Layer "H2_LOW_L04_P031" (solid, remove dead copper, pour order 31): 113.093,64.453 112.903,55.88 108.839,55.88 108.839,63.246 111.125,66.167 111.125,96.647 114.844,96.647 115.03,66.389
H2_LOW on Bottom Layer "H2_LOW_L04_P039" (solid, pour order 39): 87.884,90.424 109.601,90.424 111.125,88.9 112.903,88.9 112.903,96.012 113.157,96.266 108.585,100.838 87.884,100.838
H2_LOW on Bottom Layer "H2_LOW_L04_P006" (solid, pour order 6): 106.045,115.316 106.045,110.363 115.062,101.346 126.619,101.346 132.842,95.123 132.842,41.148 133.096,40.894 132.969,40.767 127.381,40.767 127.381,93.218 124.333,96.266 113.157,96.266 103.124,106.299 97.663,106.299 95.885,108.331 95.885,115.316
VCC on Int2 (PWR) "VCC_L03_P045" (solid, remove dead copper, pour order 45): 60.706,104.608 60.706,52.451 60.706,36.957 114.214,36.957 114.214,47.355 113.538,104.394
H2_LOW on Int1 (GND) "H2_LOW_L02_P040" (solid, remove dead copper, pour order 40): 113.266,104.521 125.222,98.175 125.222,81.915 115.824,72.517 115.824,67.183 112.903,64.262 112.903,55.88 115.316,55.88 119.38,51.816 119.38,48.514 115.316,36.957 60.96,37.211 60.96,39.751 60.96,104.521

## Keep-outs
Top Layer:
  region: 110.617,92.837 113.665,92.837 113.665,81.788 110.617,81.788
  region: 89.535,53.594 97.028,53.594 97.028,45.339 89.535,45.339

## Silkscreen, mask and mechanical layers (free items; w line width, h text height)
Top Overlay:
  text "VSUPPLY" at 123.701,113.444 h3
  text "GND" at 88.646,112.809 h3
  text "SEM,Shell Eco Marathon 2026 / MMU Grune Welt V8 / Designed by: Jordan" at 68.072,102.616 h2
Bottom Overlay:
  text "5V" at 64.008,90.943 h1
  text "VCC" at 71.246,90.181 h1
  text "VCC" at 64.134,88.53 h1
  text "U" at 173.482,88.171 h3
  text "SWDIO" at 71.374,87.641 h1
  text "Tx" at 64.389,85.852 h1
  text "SWCLK" at 71.501,85.228 h1
  text "Rx" at 64.389,83.439 h1
  text "RST" at 71.247,82.688 h1
  text "ADC1" at 64.516,81.037 h1
  text "GND" at 71.501,80.021 h1
  text "ADC2" at 64.516,78.497 h1
  text "GND" at 64.389,75.83 h1
  text "GND" at 70.485,74.56 h1
  text "5V" at 70.104,72.147 h1
  text "GND" at 64.389,70.369 h1
  text "PWM" at 70.485,69.596 h1
  text "TEMP" at 64.389,67.818 h1
  text "HALL3" at 64.643,65.289 h1
  text "V" at 173.225,65.151 h3
  text "HALL2" at 64.77,62.738 h1
  text "HALL1" at 64.77,60.325 h1
  text "5V" at 64.262,57.923 h1
  text "GND" at 63.627,47.89 h1
  text "CAN_L" at 63.754,45.39 h1
  text "CAN_H" at 63.754,42.723 h1
  text "5V" at 63.373,40.143 h1
  text "W" at 173.863,39.497 h3
Top Solder:
  rectangle: 147.701,104.267 152.908,110.236
  rectangle: 144.145,79.502 150.749,85.598
  rectangle: 129.54,98.933 132.207,105.664
  rectangle: 123.444,104.648 126.365,111.633
  rectangle: 133.096,84.455 143.002,86.741
  rectangle: 133.096,80.391 143.002,82.677
  rectangle: 133.096,55.245 143.002,57.531
  rectangle: 133.096,58.928 143.002,61.214
  rectangle: 133.096,62.738 143.002,65.024
  rectangle: 146.558,55.626 153.416,61.341
Bottom Solder:
  region: 132.842,43.18 127.381,43.18 127.381,40.894 132.842,40.894
  region: 132.842,51.435 127.381,51.435 127.381,49.149 132.842,49.149
  region: 132.842,56.007 127.381,56.007 127.381,53.721 132.842,53.721
  region: 138.303,55.88 138.303,61.341 136.017,61.341 136.017,55.88
  rectangle: 127.381,58.293 132.842,60.579
  rectangle: 127.381,61.976 132.842,64.262
  rectangle: 127.381,65.659 132.842,67.945
  rectangle: 127.381,69.596 132.842,71.882
  rectangle: 127.381,77.089 132.842,79.375
  rectangle: 127.381,81.534 132.842,83.82
  rectangle: 127.381,85.471 132.842,87.757
  rectangle: 127.381,89.154 132.842,91.44
  region: 110.998,80.772 115.824,80.772 115.824,66.802 110.998,66.802
  region: 134.62,96.901 133.985,97.536 128.397,103.124 127.127,101.854 127.127,101.6 133.223,95.504
  region: 137.16,99.441 136.525,100.076 130.937,105.664 129.667,104.394 129.667,104.14 135.763,98.044
  region: 140.208,102.616 139.573,103.251 133.985,108.839 132.715,107.569 132.715,107.315 138.811,101.219
  region: 160.909,110.49 150.876,110.49 150.876,104.267 160.909,104.267
  region: 153.035,85.471 132.969,85.471 132.969,79.248 133.096,79.375 148.971,79.375 150.495,80.899 150.622,80.899 153.162,80.899
  region: 160.782,59.563 159.131,59.563 157.353,61.341 151.13,61.341 150.876,61.087 150.876,55.88 152.908,55.88 153.924,54.864 160.909,54.864
Mechanical 1:
  lines w0.254: 60.706,36.957 60.706,112.268 60.706,117.983 175.26,117.983 177.673,117.983 177.673,36.957 60.706,36.957 ; 146.558,63.881 146.558,64.77 163.957,64.77 163.957,63.881 146.558,63.881 ; 147.32,86.868 164.719,86.868 164.719,87.757 147.32,87.757 147.32,86.868